# EAGLE board SparkFun_Qwiic_CO2_Sensor_XENSIV_PAS (EAGLE 9.6.2)
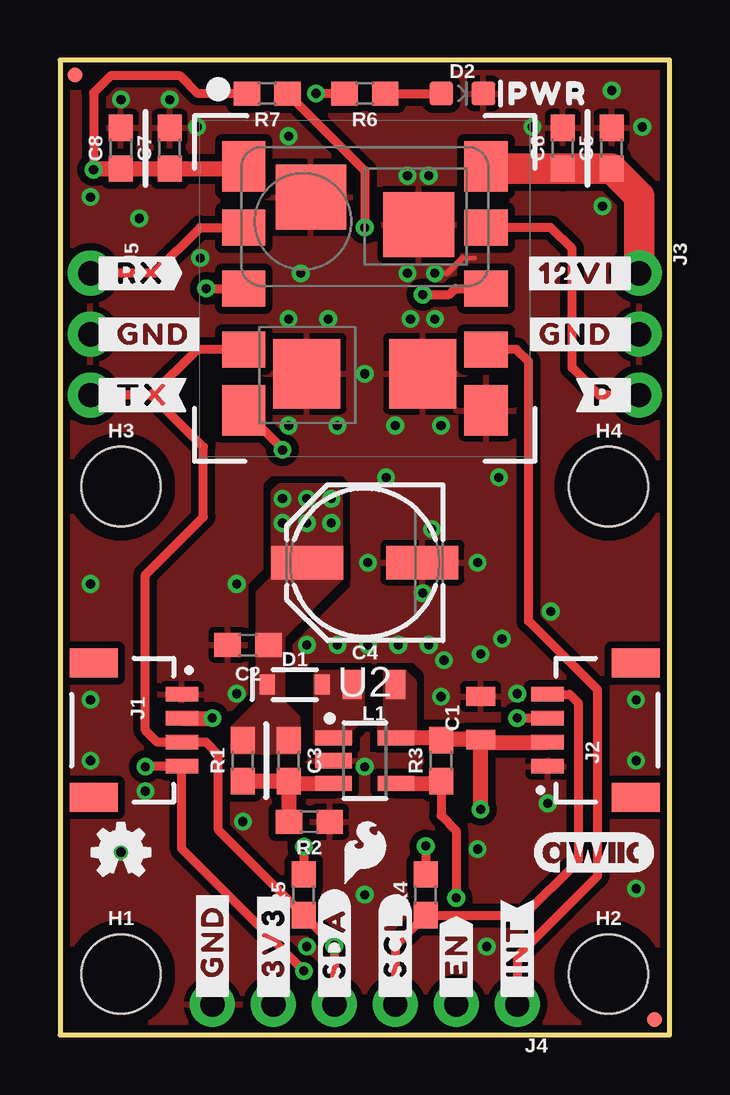
[diagram p0: board, top side]
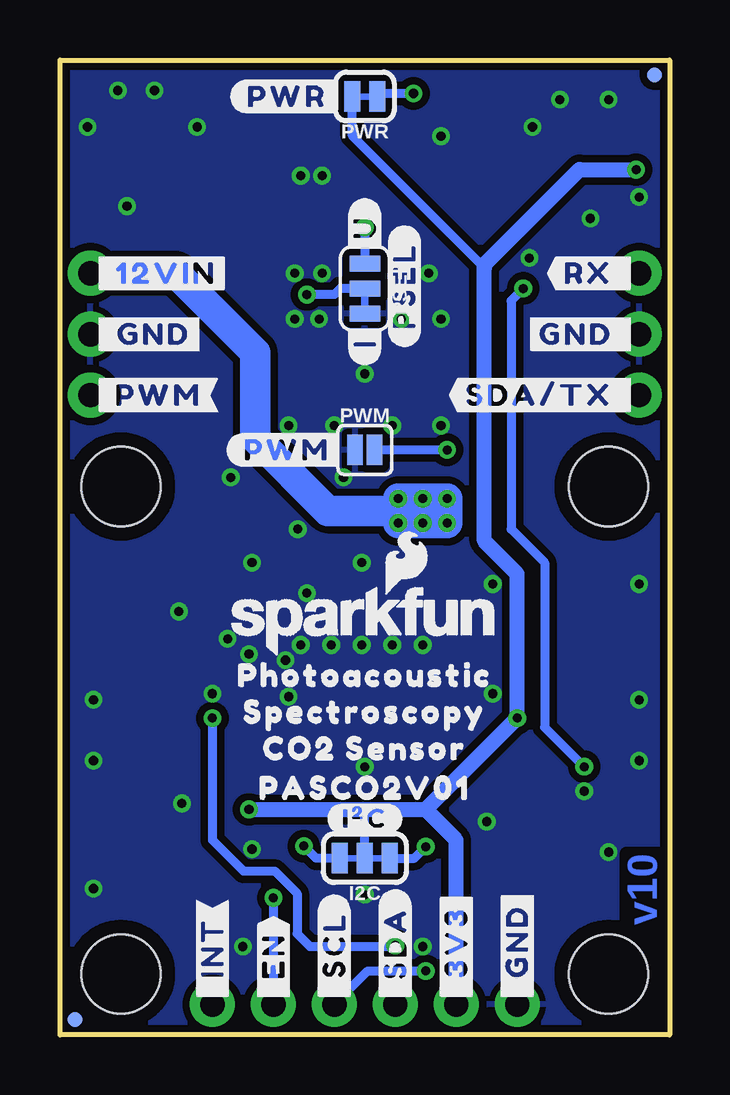
[diagram p1: board, bottom side, seen from below]

Size 25.4 x 40.64 mm. Coordinates in mm from the lower left corner, seen from the top.
Outline: 0,0 25.4,0 25.4,40.64 0,40.64 0,0
Copper layers (1*16): Top 0.035mm / dielectric 1.5mm / Bottom 0.035mm
Design rules "SparkFun-2-Layer-General-JLCPCB": minimum track width 7mil, minimum drill 0.3mm, track to track 7mil, track to pad 7mil, pad to pad 7mil, via to via 7mil, smd to smd 7mil, copper to edge 7mil, drill to drill 7mil, minimum pad ring 7mil, minimum via ring 7mil, stop-mask expansion 3mil, vias tented up to drill 25mil, thermal gap 10mil
tRestrict: area 9.8,14.9 to 10.2,15

## Footprints (pad centres in the part's own frame; a part is rotated, then mirrored left to right if it is on the bottom)
0805 = smd 0.8 x 1.2: 1 -0.9,0; 2 0.9,0
0603 = smd 1.1 x 1: 1 -0.85,0; 2 0.85,0
PANASONIC_D = smd 3 x 1.4: + 2.4,0; - -2.4,0
SOD-323 = smd 0.63 x 0.83: A 1.15,0; C -1.15,0
LED-0603 = smd 1 x 1: A -0.877,0; C 0.877,0
FIDUCIAL-MICRO = smd 0.635 x 0.635: 1 0,0
STAND-OFF = hole 3.302: 0,0
SMT-JUMPER_3_2-NC_TRACE_SILK = smd 0.66 x 1.27: 1 -1.041,0; 2 0,0; 3 1.041,0
JST04_1MM_RA = smd 0.6 x 1.35: 1 -1.5,0; 2 -0.5,0; 3 0.5,0; 4 1.5,0 | smd 1.2 x 2: NC1 2.8,-3.675; NC2 -2.8,-3.675
1X03_NO_SILK = drill 1.016 pad 1.88: 1 0,0; 2 2.54,0; 3 5.08,0
1X06_NO_SILK = drill 1.016 pad 1.88: 1 0,0; 2 2.54,0; 3 5.08,0; 4 7.62,0; 5 10.16,0; 6 12.7,0
SMT-JUMPER_3_1-NC_TRACE_SILK = smd 0.66 x 1.27: 1 -1.041,0; 2 0,0; 3 1.041,0
SMT-JUMPER_2_NO_SILK = smd 0.635 x 1.27: 1 -0.406,0; 2 0.406,0
SMT-JUMPER_2_NC_TRACE_SILK = smd 0.66 x 1.27: 1 -0.521,0; 2 0.521,0
LG-MLGA-14-1_Z8B00206105 = smd 2.1 x 1.8: 1 -5.08,-5.05; 5 5.08,-5.05; 6 5.08,5.05; 10 -5.08,5.05 | smd 1.5 x 1.8: 2 -2.54,-5.05; 3 0,-5.05; 4 2.54,-5.05; 7 2.54,5.05; 8 0,5.05; 9 -2.54,5.05 | smd 2.7 x 2.95: 11 -2.655,2.245; 12 -3.805,-2.245 | smd 2.9 x 2.8: 13 3.55,-2.415; 14 3.55,2.415
SOT95P280X145-5M = smd 1.509 x 0.629: 1 -1.303,0.95; 2 -1.303,0; 3 -1.303,-0.95; 4 1.303,-0.95; 5 1.303,0.95

## Placement (x,y rotation side)
C1  10uF  [0805]  17.53,13.21 90 top
C2  4.7uF  [0603]  7.83,16.26 180 top
C3  470pF  [0603]  9.53,11.43 270 top
C4  47uF  [PANASONIC_D]  12.7,19.68 180 top
C5  0.1uF  [0603]  22.99,36.96 90 top
C6  10nF  [0603]  20.95,36.96 90 top
C7  0.1uF  [0603]  4.57,36.96 90 top
C8  4.7uF  [0603]  2.54,36.96 90 top
D1  0.5A/40V/420mV  [SOD-323]  9.78,14.61 0 top
D2  [LED-0603]  16.76,39.24 0 top
FD1  FIDUCIALUFIDUCIAL  [FIDUCIAL-MICRO]  24.77,0.64 0 bottom
FD2  FIDUCIALUFIDUCIAL  [FIDUCIAL-MICRO]  0.64,40.01 0 bottom
FD3  FIDUCIALUFIDUCIAL  [FIDUCIAL-MICRO]  0.64,40.01 0 top
FD4  FIDUCIALUFIDUCIAL  [FIDUCIAL-MICRO]  24.77,0.64 0 top
FRAME1  FRAME-LETTER  [CREATIVE_COMMONS]  51.94,-9.4 0 top  (outside the outline)
H1  STAND-OFF  [STAND-OFF]  2.54,2.54 0 top
H2  STAND-OFF  [STAND-OFF]  22.86,2.54 0 top
H3  STAND-OFF  [STAND-OFF]  2.54,22.86 0 top
H4  STAND-OFF  [STAND-OFF]  22.86,22.86 0 top
I2C  JUMPER-SMT_3_2-NC_TRACE_SILK  [SMT-JUMPER_3_2-NC_TRACE_SILK]  12.7,7.37 180 bottom
J1  QWIIC_RA  [JST04_1MM_RA]  5.08,12.7 270 top
J2  QWIIC_RA  [JST04_1MM_RA]  20.32,12.7 90 top
J3  [1X03_NO_SILK]  24.13,31.75 270 top
J4  [1X06_NO_SILK]  19.05,1.27 180 top
J5  [1X03_NO_SILK]  1.27,31.75 270 top
L1  10uH  [0805]  13.08,14.61 180 top
LOGO1  SFE_LOGO_NAME_FLAME.1_INCH  [SFE_LOGO_NAME_FLAME_.1]  12.7,17.27 0 bottom
LOGO2  QWIIC_LOGO_5MM  [QWIIC_5MM]  22.23,7.62 0 top
LOGO3  OSHW-LOGOMINI  [OSHW-LOGO-MINI]  2.54,7.62 0 top
PSEL  JUMPER-SMT_3_1-NC_TRACE_SILK  [SMT-JUMPER_3_1-NC_TRACE_SILK]  12.7,31.11 270 bottom
PWM  JUMPER-SMT_2_NO_SILK  [SMT-JUMPER_2_NO_SILK]  12.7,24.38 0 bottom
PWR  JUMPER-SMT_2_NC_TRACE_SILK  [SMT-JUMPER_2_NC_TRACE_SILK]  12.7,39.12 180 bottom
R1  47k  [0603]  7.62,11.43 90 top
R2  5.62k  [0603]  10.39,8.89 180 top
R3  1M  [0603]  15.88,11.43 90 top
R4  2.2k  [0603]  15.24,5.84 90 top
R5  2.2k  [0603]  10.16,5.84 90 top
R6  4.7k  [0603]  12.7,39.24 180 top
R7  10k  [0603]  8.64,39.24 180 top
U1  PASCO2V01BUMA1  [LG-MLGA-14-1_Z8B00206105]  12.7,31.11 270 top
U2  LMR62421  [SOT95P280X145-5M]  12.7,11.43 0 top
U$1  [SFE_LOGO_FLAME_.1]  12.7,7.62 0 top
U$2  [#_12VIN#0]  24.13,31.75 0 bottom
U$3  [#_EN#0]  16.51,1.27 90 top
U$4  [#GND_#0]  24.13,29.21 0 top
U$5  [#GND_#0]  1.27,29.21 0 bottom
U$6  [#_TX#0]  1.27,26.67 0 top
U$7  [#_RX#0]  1.27,31.75 0 top
U$8  [#_GND#0]  1.27,29.21 0 top
U$9  [#_GND#0]  24.13,29.21 0 bottom
U$10  [#_EN#0]  16.51,1.27 90 bottom
U$11  [#_3V3#0]  8.89,1.27 90 bottom
U$12  [#RX_#0]  1.27,31.75 0 bottom
U$13  [#SDA#TX_#0]  1.27,26.67 0 bottom
U$14  [#_GND#0]  6.35,1.27 90 top
U$15  [#_SCL#0]  13.97,1.27 90 top
U$16  [#PWM#0]  13.46,24.38 0 bottom
U$17  [#P_#0]  24.13,26.67 0 top
U$18  [#_GND#0]  6.35,1.27 90 bottom
U$19  [#_3V3#0]  8.89,1.27 90 top
U$20  [#_SDA#0]  11.43,1.27 90 top
U$21  [#_INT#0]  19.05,1.27 90 top
U$22  [#_INT#0]  19.05,1.27 90 bottom
U$24  [#PSEL#0]  11.05,28.7 90 bottom
U$25  [CO2_SENSOR0]  12.7,11.94 0 bottom
U$26  [SFE_LOGO_FLAME_STOP_.1]  22.86,36.83 0 bottom
U$27  [#I�C#0]  12.7,9.02 0 bottom
U$28  [#PWR#0]  13.59,39.12 0 bottom
U$29  [PWR0]  20.32,39.24 0 top
U$30  [ORDERING_INSTRUCTIONS]  31.24,50.8 0 top  (outside the outline)
U$31  [#I#0]  12.7,28.83 90 bottom
U$32  [#U#0]  12.7,33.66 90 bottom
U$33  [#12VI_#0]  24.13,31.75 0 top
U$34  [#_PWM#0]  24.13,26.67 0 bottom
U$35  [#_SDA#0]  11.43,1.27 90 bottom
U$36  [#_SCL#0]  13.97,1.27 90 bottom
U$37  [PHOTOACOUSTIC0]  12.7,14.99 0 bottom
U$38  [SPECTROSCOPY0]  12.7,13.46 0 bottom
U$39  [PASCO2V010]  12.7,10.29 0 bottom

## Library data of the parts
C1 = SparkFun-Capacitors; PROD_ID: CAP-14259
C2 C8 = SparkFun-Capacitors; PROD_ID: CAP-14106
C3 = SparkFun-Capacitors; PROD_ID: CAP-07884
C4 = SparkFun-Capacitors; PROD_ID: CAP-08478
C5 C7 = SparkFun-Capacitors; PROD_ID: CAP-08604
C6 = SparkFun-Capacitors; PROD_ID: CAP-00867
D1 = SparkFun-DiscreteSemi; PROD_ID: DIO-10955
D2 = SparkFun-LED; PROD_ID: DIO-17976
FD1-FD4 LOGO1-LOGO3 U$1 U$26 U$30 = SparkFun-Aesthetics
FRAME1 = SparkFun-Aesthetics; DESIGNER: Alex Brudner; REV: v10
H1-H4 = SparkFun-Hardware
I2C PSEL PWM PWR = SparkFun-Jumpers
J1 J2 = SparkFun-Connectors; PROD_ID: CONN-13694
J3-J5 = SparkFun-Connectors
L1 = xensiv_pas; PN: MLZ2012M100WT000; PROD_ID: NDUC-19198
R1 = SparkFun-Resistors; PROD_ID: RES-07871
R2 = SparkFun-Resistors; PROD_ID: RES-09823
R3 = SparkFun-Resistors; PROD_ID: RES-07868
R4 R5 = SparkFun-Resistors; PROD_ID: RES-08272
R6 = SparkFun-Resistors; PROD_ID: RES-07857
R7 = SparkFun-Resistors; PROD_ID: RES-00824
U1 = xensiv_pas; PROD_ID: IC-19132
U2 = xensiv_pas; PROD_ID: VREG-19362
U$2-U$22 U$24 U$25 U$27-U$29 U$31-U$39 = output

## Nets
3.3V: C1.1 C7.1 C8.1 I2C.2 J1.2 J2.2 J4.5 L1.1 PWR.2 R3.2 R7.2 U1.1 U2.5
12V: C2.1 C3.1 C4.+ C5.1 C6.1 D1.C J3.1 R1.2 U1.10
EN: J4.2 R3.1 U2.4
GND: C1.2 C2.2 C4.- C5.2 C6.2 C7.2 C8.2 D2.C J1.1 J2.1 J3.2 J4.6 J5.2 PSEL.3 PWM.1 R2.1 U1.6 U1.11 U1.12 U1.13 U1.14 U2.2
I2C_INT: J4.1 U1.7
N$1: I2C.1 R5.2
N$2: D1.A L1.2 U2.1
N$3: I2C.3 R4.2
N$4: C3.2 R1.1 R2.2 U2.3
N$5: PSEL.2 U1.8
N$6: D2.A R6.1
N$7: PWR.1 R6.2
N$8: PSEL.1 R7.1
N$9: PWM.2 U1.5
PWM_OUT: J3.3 U1.9
RX: J5.1 U1.2
SCL: J1.4 J2.4 J4.3 R4.1 U1.3
SDA/TX: J1.3 J2.3 J4.4 J5.3 R5.1 U1.4

## Tracks (layer width: path | path; a pad name or v marks a point on that pad's centre or on a via)
3.3V  (via drill 0.38)
  Top 0.381: R7.2 5.74,39.24 5,39.98 2.11,39.98 1.4,39.27 v1.4,36.07
  Top 0.635: 7.56,36.11 C7.1 C8.1 1.44,36.11 v1.4,36.07 | C1.1 17.63,12.2 J2.2 | v17.53,9.4 C1.1 | J1.2 v6.34,13.2 v6.35,13.21 | C1.1 15.9,12.31 R3.2 15.78,12.38 U2.5
  Top 0.762: 7.56,36.11 U1.1
  Bottom 0.381: PWR.2 13.22,37.48 7.72,31.98 | I2C.2 12.7,9.4
  Bottom 0.635: 10.16,9.4 v6.35,13.21 6.35,19.22 7.72,20.59 7.72,31.98 7.72,32.11 3.76,36.07 v1.4,36.07 | v17.53,9.4 12.7,9.4 10.16,9.4 | J4.5 8.89,8.13 10.16,9.4
  pour Top (isolate 0.305, no thermals): 13.34,12.19 13.34,12.83 13.59,13.08 13.59,15.11 14.35,15.11 14.73,14.73 14.73,12.19
12V  (via drill 0.38)
  Top 1.27: U1.10 17.84,36.11 C6.1 C5.1 24.13,34.96 J3.1
  Bottom 1.27: v10.29,21.34 v9.27,21.34 v9.27,22.35 v10.29,22.35 v11.3,22.35 v11.3,21.34 v10.29,21.34 | v10.29,21.34 10.79,21.84 14.24,21.84 17.27,24.87 17.27,28.45 20.57,31.75 J3.1
  pour Top (isolate 0.305, no thermals): 9.91,11.81 9.91,13.21 9.27,13.84 9.27,16.64 11.68,19.05 11.68,22.61 11.43,22.86 9.14,22.86 8.89,22.61 8.89,19.05 8.26,18.41 8.26,13.84 7.24,12.83 7.24,11.81
EN  (via drill 0.38)
  Top 0.381: R3.1 15.88,9.14 16.51,8.51 v16.51,5.71
  Top 0.635: U2.4 15.78,10.48 R3.1
  Bottom 0.381: v16.51,5.71 J4.2
GND  (via drill 0.38)
  Top 0.178: v15.62,31.75 16.13,31.75 | 16.76,32.38 17.27,32.38
  Top 0.254: 16.13,31.75 16.76,32.38
  other vias: 15.88,25.4 13.97,25.4 11.56,25.4 9.53,25.4 9.53,29.84 11.18,29.84 14.61,29.84 15.62,29.84 14.48,31.75 10.03,31.75 9.53,37.47 14.48,35.81 15.37,35.81 7.37,18.8 12.7,11.18 15.88,14.1 24,11.43 24,13.97 2.54,7.62 1.27,11.43 1.27,13.97 1.27,18.8 12.83,19.68 17.4,19.68 12.7,27.56 3.3,34.04 1.27,34.92 5.71,37.85 2.54,38.99 4.57,38.99 21.46,39.37 22.99,39.37 24.26,37.85 19.68,37.85 22.61,34.54 18.29,23.24 10.29,16.26 13.59,23.24 15.49,21.08 15.11,18.41 17.53,15.88 11.56,16.26 12.83,16.26 14.1,16.26 15.37,16.26 16,15.62 7.37,14.22 20.45,17.65 18.41,16.51 24,6.1 5.84,32.38 20.32,9.65 17.4,7.75 17.78,3.68 7.62,8.89 10.29,3.68 3.56,10.16 19.05,14.22 12.7,5.84
  pour Bottom (isolate 0.305, rank 2): 0,40.64 0,0 25.4,0 25.4,40.64
  pour Top (isolate 0.305, rank 2): 0,0 25.4,0 25.4,40.64 0,40.64
I2C_INT
  Top 0.381: U1.7 19.02,28.57 19.53,28.07 19.53,17.25 22.4,14.38 22.4,6.63 19.05,3.27 J4.1
N$1  (via drill 0.38)
  Top 0.381: v10.16,7.84 R5.2
  Bottom 0.381: I2C.1 10.64,7.37 v10.16,7.84
N$2
  pour Top (isolate 0.305, no thermals): 12.57,15.11 12.57,13.21 12.06,12.7 12.06,12.19 10.67,12.19 10.67,14.99 10.79,15.11
N$3  (via drill 0.38)
  Top 0.381: v15.24,7.87 R4.2
  Bottom 0.381: I2C.3 14.73,7.37 v15.24,7.87
N$4
  Top 0.635: R1.1 C3.2 | C3.2 9.62,10.48 U2.3 | C3.2 9.53,8.9 R2.2
N$5  (via drill 0.38)
  Top 0.381: v15.11,30.86 16.23,30.86 16.48,31.11 U1.8
  Bottom 0.381: PSEL.2 13.72,31.11 13.97,30.86 v15.11,30.86
N$6
  Top 0.381: R6.1 D2.A
N$7  (via drill 0.38)
  Top 0.381: R6.2 v10.67,39.24
  Bottom 0.381: v10.67,39.24 12.05,39.24 PWR.1
N$8  (via drill 0.38)
  Top 0.381: R7.1 12.7,36.03 v12.7,33.66
  Bottom 0.381: v12.7,33.66 PSEL.1
N$9  (via drill 0.38)
  Top 0.381: U1.5 9.27,24.41 v9.27,24.38
  Bottom 0.381: v9.27,24.38 PWM.2
PWM_OUT
  Top 0.381: J3.3 22.48,26.67 21.34,27.81 21.34,32.77 20.45,33.66 U1.9
RX
  Top 0.381: U1.2 5.84,33.66 3.94,31.75 J5.1
SCL  (via drill 0.38)
  Top 0.381: v6.1,31.11 U1.3 | J2.4 21.23,14.2 21.59,13.84 21.59,7.24 19.3,4.95 15.28,4.95 R4.1 13.97,3.72 J4.3 | v3.56,11.18 3.58,11.2 J1.4 5.08,7.75 v10.16,2.67
  Bottom 0.381: v3.56,11.18 5.21,12.83 5.21,19.68 6.6,21.08 6.6,30.61 v6.1,31.11 | v10.16,2.67 12.57,2.67 J4.3
SDA/TX  (via drill 0.38)
  Top 0.381: J4.4 v11.43,3.72 R5.1 6.6,8.55 6.6,11.68 6.08,12.2 J1.3 4.06,12.2 3.56,12.7 3.56,19.18 5.97,21.59 5.97,24.51 3.81,26.67 | J2.3 v19.06,13.2 v19.05,13.21 | 3.81,26.67 J5.3 | 3.81,26.67 5.71,28.57 U1.4
  Bottom 0.381: v19.05,13.21 19.05,8.13 17.75,6.83 16.46,6.83 15.52,5.89 15.52,4.22 14.99,3.68 11.47,3.68 v11.43,3.72

## Text on the board
Bottom: v10
Measures: All Units in Inches
tDocu: Thickness: 0.063 in | Finish Lead-Free HASL | Material: TG155 | Solder Mask: Red | Layers: 2 | Alex Brudner